# EAGLE board MIDI-CPU-cradle (EAGLE 6.6.0)
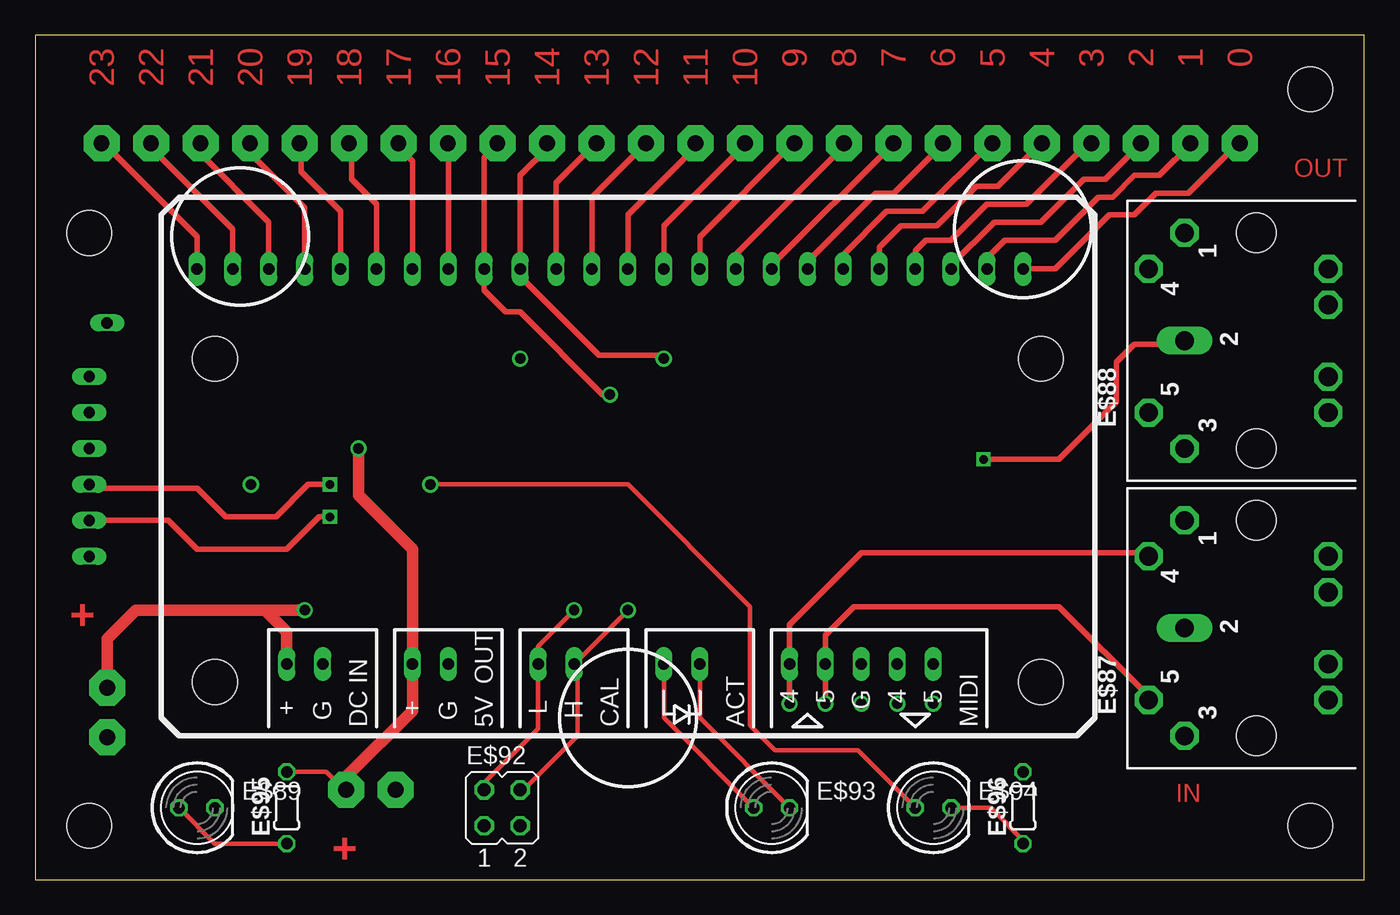
[diagram p0: board, top side]
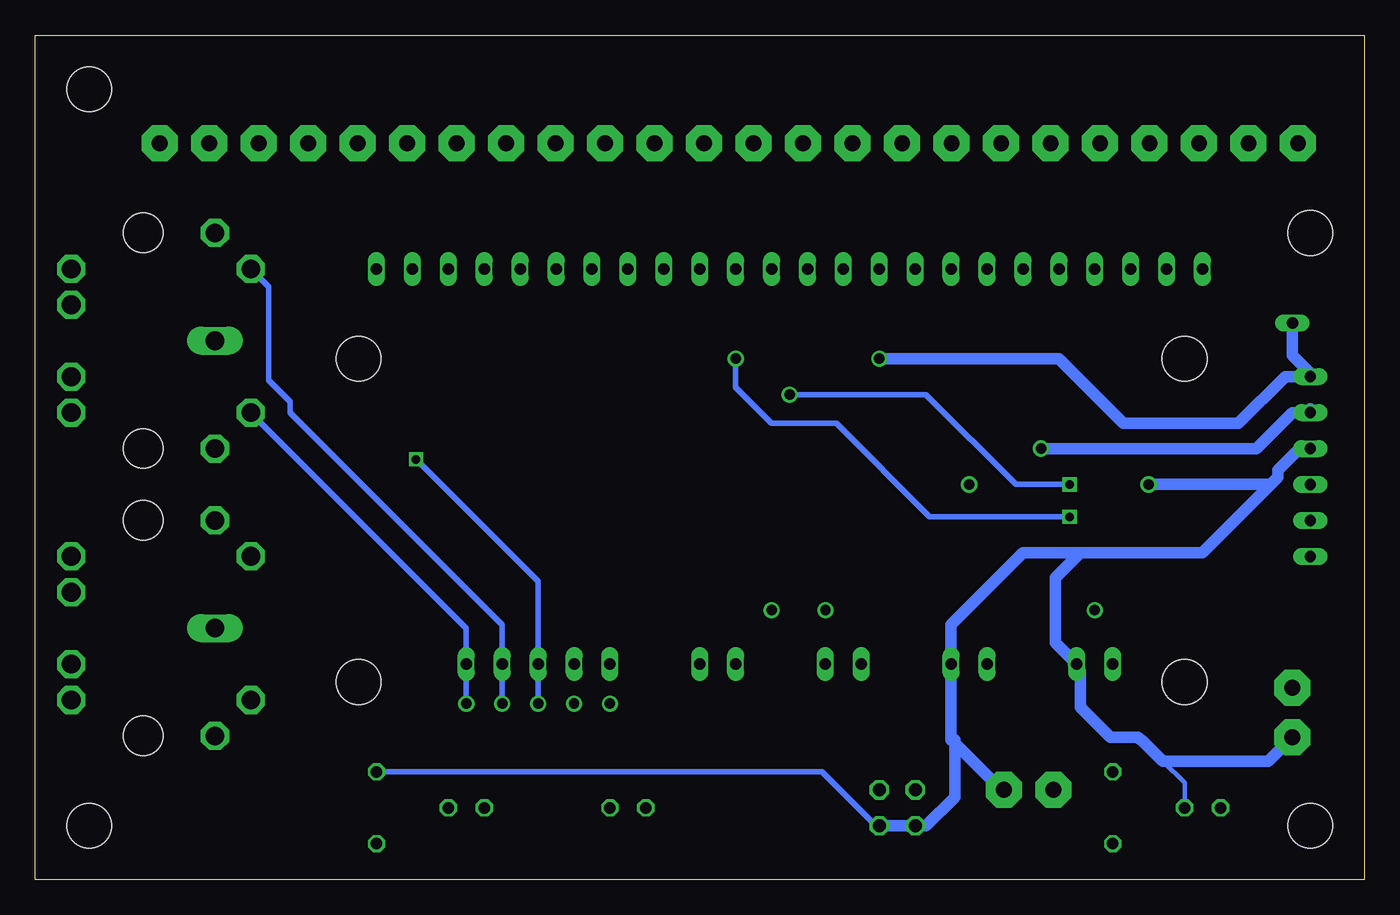
[diagram p1: board, bottom side, seen from below]

Size 93.98 x 59.69 mm. Coordinates in mm from the lower left corner, seen from the top.
Outline: 0,59.69 0,0 93.98,0 93.98,59.69 0,59.69
Copper layers (1*16): L1 0.0178mm / dielectric 59mil / L4 0.0178mm
Design rules "SSC-EAGLE-2Lyr_v1.0.0.3": minimum track width 6mil, minimum drill 14mil, track to track 6mil, track to pad 6mil, pad to pad 6mil, via to via 6mil, smd to smd 6mil, copper to edge 20mil, drill to drill 16mil, minimum pad ring 8mil, minimum via ring 8mil, stop-mask expansion 3mil, vias tented up to drill 0mil, thermal gap 10mil
Net classes: 0 default: width 0.203 mm, drill 0.305 mm, clearance 0.203 mm; 1 power: width 0.406 mm, drill 0.305 mm, clearance 0.254 mm
Holes 3.17 mm at 12.7,13.97 71.12,13.97 12.7,36.83 71.12,36.83 3.81,45.72 90.17,55.88 90.17,3.81 3.81,3.81

## Footprints (pad centres in the part's own frame; a part is rotated, then mirrored left to right if it is on the bottom)
2,54/0,8 = drill 1.118 pad 2.54 octagon: 1 0,0
WIREPAD-NICE = drill 0.813 long: P$1 0,0
SPRING-CONTACT-025 = drill 0.737: P$1 0,0
MAB5SH = drill 1.321 octagon: 1 7.62,5.08; 3 -7.62,5.08; 4 5.08,7.62; 5 -5.08,7.62; PE -2.54,-5.08; PE1 -5.08,-5.08; PE@ 2.54,-5.08; PE@1 5.08,-5.08 | drill 1.321 long: 2 0,5.08 | hole 2.794: 7.62,0; -7.62,0
LED5MM = drill 0.813 octagon: A -1.27,0; K 1.27,0
JP2Q = drill 0.914 octagon: 1 -1.27,-1.27; 2 -1.27,1.27; 3 1.27,-1.27; 4 1.27,1.27
0204/5 = drill 0.813 octagon: 1 -2.54,0; 2 2.54,0

## Placement (x,y rotation side)
E$1  [2,54/0,8]  46.68,52.07 0 top
E$2  [2,54/0,8]  50.18,52.07 0 top
E$3  [2,54/0,8]  53.68,52.07 0 top
E$4  [2,54/0,8]  57.18,52.07 0 top
E$5  [WIREPAD-NICE]  11.43,43.18 0 top
E$6  [WIREPAD-NICE]  13.97,43.18 0 top
E$7  [WIREPAD-NICE]  16.51,43.18 0 top
E$8  [WIREPAD-NICE]  19.05,43.18 0 top
E$9  [WIREPAD-NICE]  21.59,43.18 0 top
E$10  [WIREPAD-NICE]  24.13,43.18 0 top
E$11  [WIREPAD-NICE]  26.67,43.18 0 top
E$12  [WIREPAD-NICE]  29.21,43.18 0 top
E$13  [WIREPAD-NICE]  31.75,43.18 0 top
E$14  [WIREPAD-NICE]  34.29,43.18 0 top
E$15  [WIREPAD-NICE]  36.83,43.18 0 top
E$16  [WIREPAD-NICE]  39.37,43.18 0 top
E$17  [WIREPAD-NICE]  41.91,43.18 0 top
E$18  [WIREPAD-NICE]  44.45,43.18 0 top
E$19  [WIREPAD-NICE]  46.99,43.18 0 top
E$20  [WIREPAD-NICE]  49.53,43.18 0 top
E$21  [WIREPAD-NICE]  52.07,43.18 0 top
E$22  [WIREPAD-NICE]  54.61,43.18 0 top
E$23  [WIREPAD-NICE]  57.15,43.18 0 top
E$24  [WIREPAD-NICE]  59.69,43.18 0 top
E$25  [WIREPAD-NICE]  62.23,43.18 0 top
E$26  [WIREPAD-NICE]  64.77,43.18 0 top
E$27  [WIREPAD-NICE]  67.31,43.18 0 top
E$28  [WIREPAD-NICE]  69.85,43.18 0 top
E$30  [WIREPAD-NICE]  20.32,15.24 0 top
E$31  [2,54/0,8]  60.68,52.07 0 top
E$32  [2,54/0,8]  64.18,52.07 0 top
E$33  [2,54/0,8]  67.68,52.07 0 top
E$34  [WIREPAD-NICE]  17.78,15.24 0 top
E$35  [SPRING-CONTACT-025]  38.1,19.05 0 bottom
E$36  [SPRING-CONTACT-025]  41.91,19.05 0 bottom
E$37  [WIREPAD-NICE]  26.67,15.24 0 top
E$38  [WIREPAD-NICE]  29.21,15.24 0 top
E$39  [SPRING-CONTACT-025]  15.24,27.94 0 bottom
E$40  [WIREPAD-NICE]  44.45,15.24 0 top
E$41  [WIREPAD-NICE]  46.99,15.24 0 top
E$42  [WIREPAD-NICE]  53.34,15.24 0 top
E$43  [WIREPAD-NICE]  35.56,15.24 0 top
E$44  [WIREPAD-NICE]  38.1,15.24 0 top
E$45  [SPRING-CONTACT-025]  22.86,30.48 0 bottom
E$46  [WIREPAD-NICE]  3.81,35.56 90 top
E$47  [WIREPAD-NICE]  55.88,15.24 0 top
E$48  [SPRING-CONTACT-025]  27.94,27.94 0 bottom
E$49  [WIREPAD-NICE]  58.42,15.24 0 top
E$50  [WIREPAD-NICE]  60.96,15.24 0 top
E$51  [WIREPAD-NICE]  63.5,15.24 0 top
E$52  [SPRING-CONTACT-025]  53.34,12.45 0 bottom
E$53  [SPRING-CONTACT-025]  55.88,12.45 0 bottom
E$54  [SPRING-CONTACT-025]  58.42,12.45 0 bottom
E$55  [SPRING-CONTACT-025]  19.05,19.05 0 bottom
E$56  [SPRING-CONTACT-025]  34.29,36.83 0 bottom
E$57  [SPRING-CONTACT-025]  40.64,34.29 0 bottom
E$58  [SPRING-CONTACT-025]  44.45,36.83 0 bottom
E$59  [SPRING-CONTACT-025]  60.96,12.45 0 bottom
E$60  [SPRING-CONTACT-025]  63.5,12.45 0 bottom
E$61  [2,54/0,8]  71.18,52.07 0 top
E$62  [2,54/0,8]  74.68,52.07 0 top
E$63  [2,54/0,8]  78.18,52.07 0 top
E$64  [2,54/0,8]  81.68,52.07 0 top
E$65  [2,54/0,8]  85.18,52.07 0 top
E$67  [2,54/0,8]  4.68,52.07 0 top
E$68  [2,54/0,8]  8.18,52.07 0 top
E$69  [2,54/0,8]  11.68,52.07 0 top
E$70  [2,54/0,8]  15.18,52.07 0 top
E$71  [2,54/0,8]  18.68,52.07 0 top
E$72  [2,54/0,8]  22.18,52.07 0 top
E$73  [2,54/0,8]  25.68,52.07 0 top
E$74  [2,54/0,8]  29.18,52.07 0 top
E$75  [2,54/0,8]  32.68,52.07 0 top
E$76  [2,54/0,8]  36.18,52.07 0 top
E$77  [2,54/0,8]  39.68,52.07 0 top
E$78  [2,54/0,8]  43.18,52.07 0 top
E$79  [WIREPAD-NICE]  3.81,33.02 90 top
E$80  [WIREPAD-NICE]  3.81,30.48 90 top
E$81  [WIREPAD-NICE]  3.81,27.94 90 top
E$82  [WIREPAD-NICE]  3.81,25.4 90 top
E$83  [WIREPAD-NICE]  3.81,22.86 90 top
E$84  [WIREPAD-NICE]  5.08,39.37 90 top
E$85  [2,54/0,8]  5.08,10.07 90 top
E$86  [2,54/0,8]  5.08,13.57 90 top
E$87  [MAB5SH]  86.36,17.78 90 top
E$88  [MAB5SH]  86.36,38.1 90 top
E$89  [LED5MM]  11.43,5.08 0 top
E$90  [2,54/0,8]  25.49,6.35 180 top
E$91  [2,54/0,8]  21.99,6.35 180 top
E$92  [JP2Q]  33.02,5.08 0 top
E$93  [LED5MM]  52.07,5.08 0 top
E$94  [LED5MM]  63.5,5.08 0 top
E$95  [0204/5]  17.78,5.08 90 top
E$96  [0204/5]  69.85,5.08 90 top

## Library data of the parts
E$1-E$4 E$31-E$33 E$61-E$65 E$67-E$78 E$85 E$86 E$90 E$91 = wirepad
E$5-E$28 E$30 E$34-E$60 E$79-E$84 = 0jrs
E$87 E$88 = con-hirschmann
E$89 E$93 E$94 = led
E$92 = jumper
E$95 E$96 = rcl

## Nets
ACT: E$41.P$1 E$93.K
CAL-H: E$36.P$1 E$44.P$1 E$92.4
CAL-L: E$35.P$1 E$43.P$1 E$92.2
DEBUG: E$48.P$1 E$94.A
GND1: E$30.P$1 E$38.P$1 E$39.P$1 E$80.P$1 E$85.1 E$89.K E$90.1 E$92.1 E$92.3 E$96.2
PCLK: E$14.P$1 E$58.P$1 E$76.1 E$82.P$1
PDAT: E$13.P$1 E$57.P$1 E$75.1 E$81.P$1
S$1: E$8.P$1 E$70.1
S$2: E$7.P$1 E$69.1
S$3: E$6.P$1 E$68.1
S$4: E$5.P$1 E$67.1
S$5: E$94.K E$96.1
S$6: E$51.P$1 E$60.P$1 E$88.5
S$7: E$40.P$1 E$93.A
S$8: E$50.P$1 E$59.P$1 E$88.4
S$9: E$9.P$1 E$71.1
S$10: E$10.P$1 E$72.1
S$11: E$11.P$1 E$73.1
S$12: E$12.P$1 E$74.1
S$13: E$42.P$1 E$52.P$1 E$87.4
S$14: E$49.P$1 E$54.P$1 E$88.2
S$15: E$15.P$1 E$77.1
S$16: E$16.P$1 E$78.1
S$17: E$1.1 E$17.P$1
S$18: E$2.1 E$18.P$1
S$19: E$3.1 E$19.P$1
S$20: E$4.1 E$20.P$1
S$21: E$28.P$1 E$65.1
S$22: E$27.P$1 E$64.1
S$23: E$26.P$1 E$63.1
S$24: E$25.P$1 E$62.1
S$25: E$24.P$1 E$61.1
S$26: E$23.P$1 E$33.1
S$27: E$22.P$1 E$32.1
S$28: E$21.P$1 E$31.1
S$29: E$34.P$1 E$55.P$1 E$86.1
S$31: E$47.P$1 E$53.P$1 E$87.5
S$34: E$89.A E$95.1
VDD1: E$37.P$1 E$45.P$1 E$79.P$1 E$91.1 E$95.2
VPP: E$46.P$1 E$56.P$1 E$84.P$1

## Tracks (layer width: path | path; a pad name or v marks a point on that pad's centre or on a via)
ACT
  L1 0.305: E$41.P$1 46.99,11.43 E$93.K
CAL-H
  L1 0.305: E$92.4 34.54,6.35 38.35,10.16 38.35,14.99 E$44.P$1 E$36.P$1
CAL-L
  L1 0.305: E$92.2 31.75,6.86 35.56,10.67 E$43.P$1 35.56,16.51 E$35.P$1
DEBUG
  L1 0.305: E$48.P$1 41.91,27.94 50.55,19.3 50.55,10.92 52.32,9.14 58.17,9.14 E$94.A
GND1
  L4 0.305: 16,10.07 16,10.16 | E$89.K 12.7,6.86 14.22,8.38
  L4 0.406: E$92.3 34.54,3.81 38.35,7.62 E$96.2
  L4 0.813: E$92.3 E$92.1 30.99,3.81 28.96,5.84 28.96,9.91 29.08,9.78 | E$90.1 25.65,6.35 29.08,9.78 | 29.08,9.78 29.21,9.91 E$38.P$1 29.21,18.03 24.13,23.11 20.07,23.11 | 20.07,23.11 21.84,21.34 21.84,16.76 E$30.P$1 20.57,15.24 20.07,14.73 20.07,12.19 17.94,10.07 16,10.07 15.84,9.91 15.75,9.91 14.22,8.38 6.77,8.38 E$85.1 | 20.07,23.11 11.43,23.11 6.6,27.94 | 6.6,27.94 E$39.P$1 | 6.6,27.94 6.1,28.45 6.1,28.96 4.57,30.48 E$80.P$1
PCLK  (via drill 0.6)
  L1 0.406: E$82.P$1 9.4,25.4 11.43,23.37 17.78,23.37 20.07,25.65 v20.83,25.65 | E$58.P$1 44.2,37.08 39.88,37.08 34.29,42.67 E$14.P$1 34.29,49.78 36.32,51.82 36.18,51.96 E$76.1
  L4 0.406: E$58.P$1 44.45,34.8 41.91,32.26 37.34,32.26 30.73,25.65 v20.83,25.65
PDAT  (via drill 0.6)
  L1 0.305: E$81.P$1 3.81,28.19 4.32,27.69
  L1 0.406: v20.83,27.94 19.3,27.94 17.02,25.65 13.46,25.65 11.43,27.69 4.32,27.69 | E$57.P$1 40.13,34.29 34.29,40.13 33.27,40.13 31.75,41.66 E$13.P$1 31.75,51.05 32.77,52.07 E$75.1
  L4 0.406: E$57.P$1 30.99,34.29 24.64,27.94 v20.83,27.94
S$1
  L1 0.406: E$8.P$1 19.05,47.5 15.24,51.31 15.24,51.56 14.99,51.82 15.18,52.01 E$70.1
S$2
  L1 0.406: E$7.P$1 16.51,46.48 11.43,51.56 11.43,51.82 E$69.1
S$3
  L1 0.406: E$68.1 8.18,51.87 8.13,51.82 13.97,45.97 E$6.P$1
S$4
  L1 0.254: E$5.P$1 11.68,43.18
  L1 0.406: E$67.1 4.83,52.07 11.43,45.47 E$5.P$1
S$5
  L1 0.305: E$96.1 70.1,2.54 67.56,5.08 E$94.K
S$6
  L4 0.406: E$88.5 63.5,17.78 E$51.P$1 63.5,12.7 63.75,12.45 E$60.P$1
S$7
  L1 0.305: E$40.P$1 44.45,11.43 E$93.A
S$8
  L4 0.406: E$59.P$1 61.21,12.7 60.96,12.95 E$50.P$1 60.96,18.03 75.95,33.02 75.95,33.78 77.47,35.31 77.47,41.91 E$88.4 78.99,43.43
S$9
  L1 0.406: E$9.P$1 21.59,47.24 18.8,50.04 18.8,52.07 E$71.1
S$10
  L1 0.406: E$10.P$1 24.13,47.75 22.35,49.53 22.35,51.31 21.84,51.82 22.1,52.07 E$72.1
S$11
  L1 0.406: E$73.1 25.68,51.84 25.65,51.82 26.67,50.8 E$11.P$1
S$12
  L1 0.406: E$74.1 29.18,51.85 29.21,51.82 E$12.P$1
S$13
  L1 0.406: E$87.4 78.99,23.11 58.42,23.11 53.34,18.03 E$42.P$1 E$52.P$1
S$14  (via drill 0.6)
  L1 0.406: v67.06,29.72 72.39,29.72 76.45,33.78 76.45,36.58 77.72,37.85 81.28,37.85 E$88.2
  L4 0.406: v67.06,29.72 58.42,21.08 E$49.P$1 E$54.P$1
S$15
  L1 0.406: E$77.1 39.62,52.07 36.83,49.28 E$15.P$1
S$16
  L1 0.406: E$16.P$1 39.37,48.26 E$78.1
S$17
  L1 0.406: E$1.1 46.68,51.87 46.74,51.82 41.91,46.99 E$17.P$1
S$18
  L1 0.406: E$2.1 50.18,51.96 44.45,46.23 E$18.P$1
S$19
  L1 0.406: E$3.1 53.59,52.07 46.99,45.47 E$19.P$1
S$20
  L1 0.406: E$4.1 57.4,52.07 49.53,44.2 E$20.P$1
S$21
  L1 0.406: E$28.P$1 72.14,43.18 75.95,46.99 77.72,46.99 79.25,48.51 81.53,48.51 85.09,52.07 E$65.1
S$22
  L1 0.406: E$27.P$1 67.31,43.94 68.58,45.21 72.14,45.21 75.18,48.26 76.2,48.26 77.72,49.78 79.5,49.78 81.79,52.07 E$64.1
S$23
  L1 0.406: E$26.P$1 64.77,43.43 67.82,46.48 71.12,46.48 74.17,49.53 75.69,49.53 78.18,52.02 E$63.1
S$24
  L1 0.254: E$25.P$1 62.23,43.43 | E$62.1 74.37,52.07
  L1 0.406: 62.23,43.43 62.23,44.45 62.99,45.21 64.77,45.21 67.31,47.75 70.1,47.75 74.68,52.32 E$62.1
S$25
  L1 0.406: E$24.P$1 59.69,44.7 61.21,46.23 63.75,46.23 66.55,49.02 68.07,49.02 71.12,52.07 E$61.1
S$26
  L1 0.406: E$23.P$1 57.15,44.2 60.2,47.24 62.74,47.24 67.56,52.07 E$33.1
S$27
  L1 0.406: E$22.P$1 54.61,43.69 59.44,48.51 60.71,48.51 64.18,51.99 E$32.1
S$28
  L1 0.406: E$31.1 60.71,52.07 52.07,43.43 E$21.P$1
S$29
  L1 0.813: E$86.1 5.08,17.02 7.11,19.05 16.26,19.05 | 16.26,19.05 17.78,17.53 E$34.P$1 | 16.26,19.05 E$55.P$1
S$31
  L1 0.406: E$87.5 78.74,12.95 72.39,19.3 57.91,19.3 55.88,17.27 E$47.P$1 E$53.P$1
S$34
  L1 0.305: E$89.A 12.7,2.54 E$95.1
VDD1
  L1 0.305: E$91.1 21.84,6.35 20.57,7.62 E$95.2
  L1 0.813: E$91.1 21.99,7.26 26.67,11.94 E$37.P$1 26.67,23.37 22.86,27.18 E$45.P$1
  L4 0.813: E$45.P$1 7.62,30.48 5.08,33.02 E$79.P$1 3.81,33.27
VPP
  L4 0.813: E$56.P$1 21.59,36.83 17.02,32.26 8.89,32.26 5.59,35.56 E$46.P$1 3.81,35.81 5.08,37.08 E$84.P$1

## Text on the board
L1: 23 | 22 | 21 | 20 | 19 | 18 | 17 | 16 | 15 | 14 | 13 | 12 | 11 | 10 | 9 | 8 | 7 | 6 | 5 | 4 | 3 | 2 | 1 | 0 | OUT | + | IN | +
tPlace: IN | OUT | + | G | + | G | L | H | 4 | 5 | G | 4 | 5 | DC | 5V | CAL | ACT | MIDI
Document: MIDI CPU Programming Cradle / / copyright John Staskevich, 2017 / / john@codeandcopper.com / / This work is licensed under a Creative Commons Attribution 4.0 International License. / http://creativecommons.org/licenses/by/4.0/